# Altium PCB KB PoC.PcbDoc
Units mm, origin at the board's own origin, x right, y up, seen from the top; angles counter-clockwise.
Board outline 88.39 x 58.8 mm, 2 copper layers (Top Layer, Bottom Layer); 22 components, 19 nets, 144 pads, 12 vias.
Unrouted connection lines stored in the file: 2.
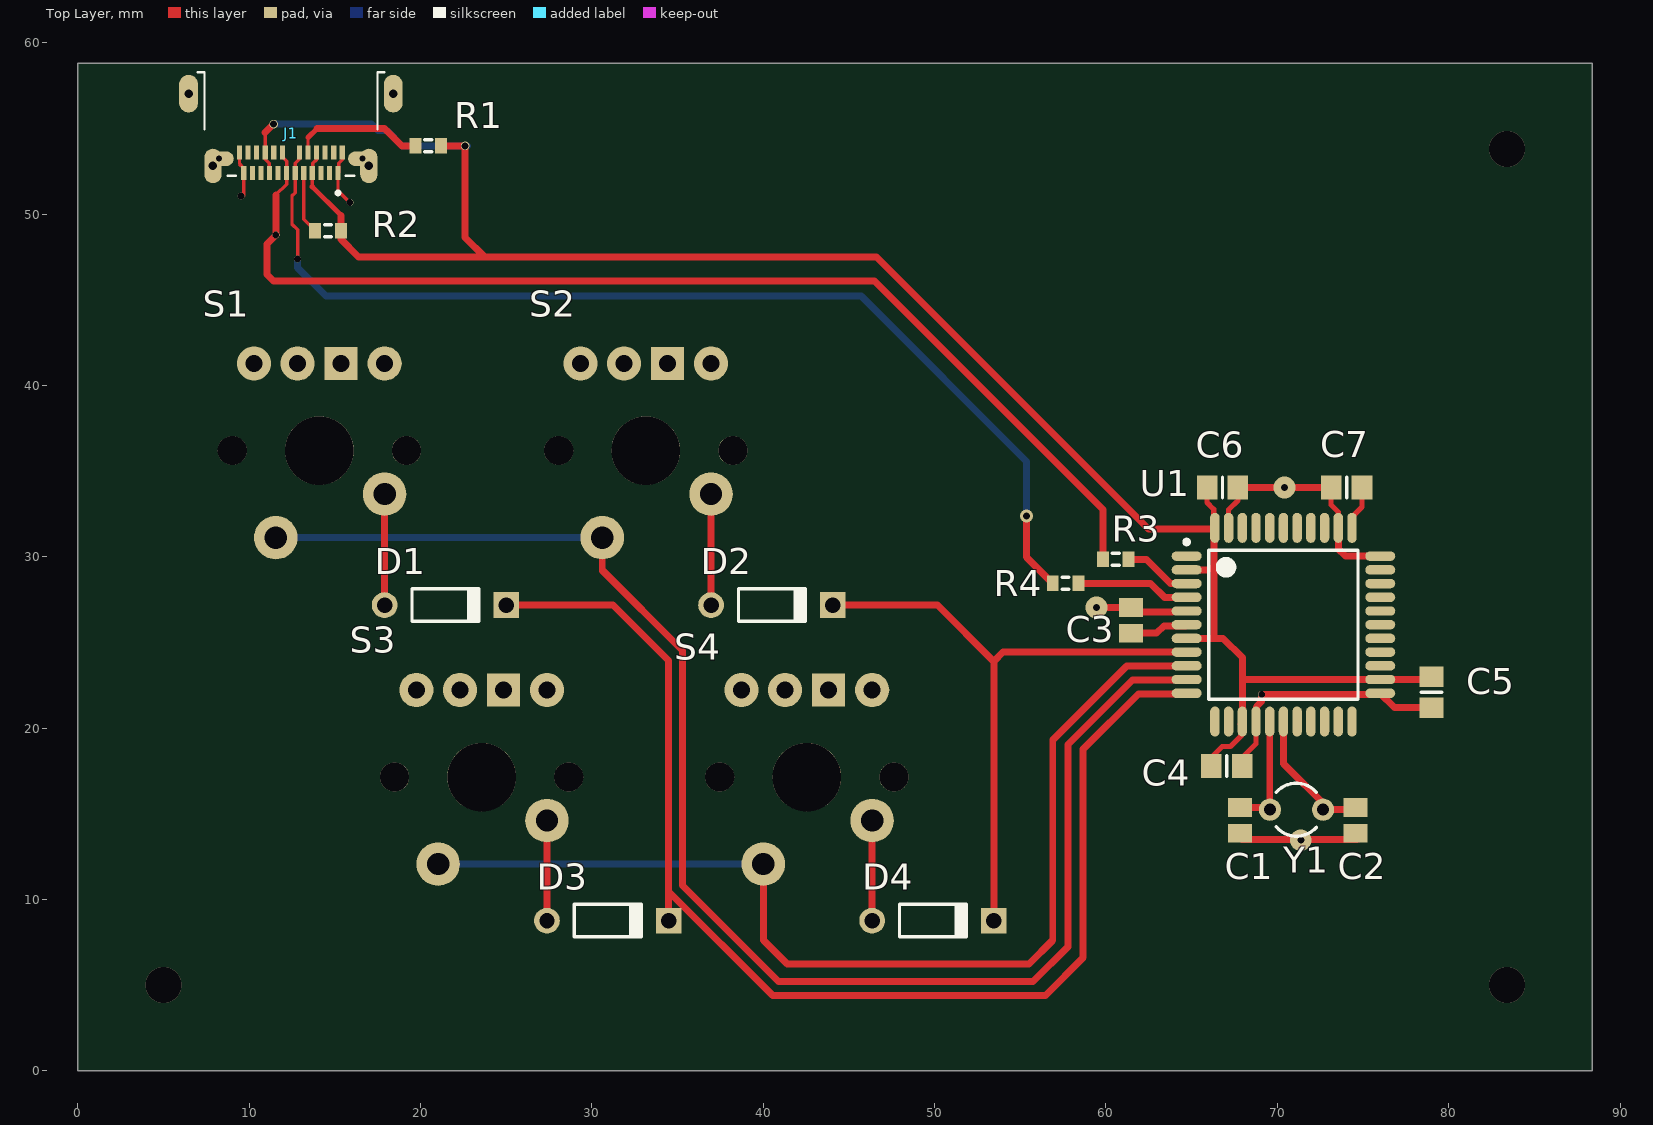
[diagram p0: Top Layer view]
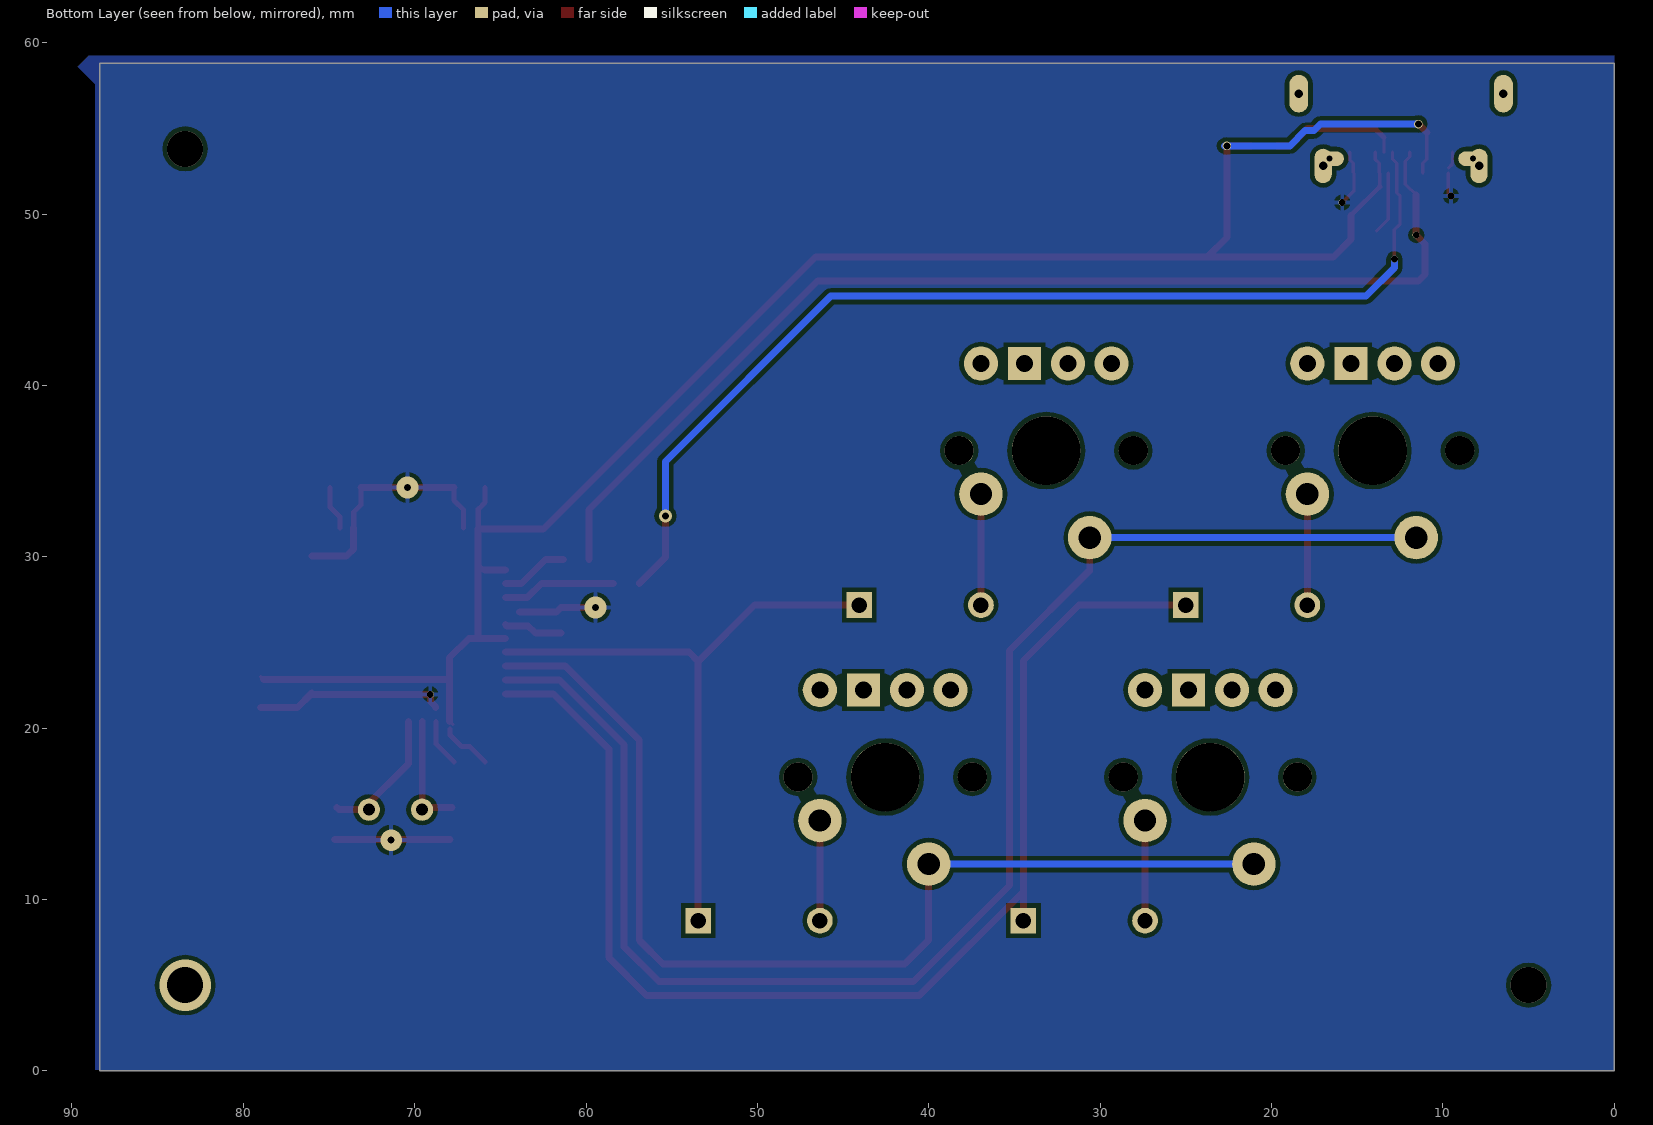
[diagram p1: Bottom Layer view, seen from below]

## Layer stack, top to bottom
Top Solder: solder mask 0.0102, Solder Resist, Dk 3.5
Top Layer: signal copper 0.0356
Dielectric 1: dielectric 0.32, FR-4, Dk 4.8
Bottom Layer: signal copper 0.0356
Bottom Solder: solder mask 0.0102, Solder Resist, Dk 3.5

## Board outline
0,0 88.392,0 88.392,58.801 0,58.801

## Design rules (kind name [scope] priority, off if disabled: settings)
Clearance [All] p1: gap=0.254 ignorepadtopadclearanceinfootprint=TRUE except(0: Arc-Hole Track-Hole SMDPad-Hole THPad-Hole Via-Hole Fill-Hole Poly-Hole Region-Hole Text-Hole; 0.406: Arc-Arc Arc-Track Track-Track)
PolygonConnect [All] p1: connectstyle=Relief reliefconductorwidth=0.254 reliefentries=4 polygonreliefangle="90 Angle" airgapwidth=0.254
RoutingVias [All] p1: holewidth=0.711 width=1.27 viastyle="Through Hole" minholewidth=0.711 minwidth=1.27 maxholewidth=0.711 maxwidth=1.27
SolderMaskExpansion [All] p1: expansion=0.102
Width [All] p1: maxlimit=0.406 minlimit=0.102 preferedwidth=0.406 minimp=50.000000 maximp=50.000000 favimp=50.000000
30 further rules are at their usual default settings.

## Components (designator, comment, footprint, x,y, rotation, side; value= is the part's Value field where it differs from the comment)
C1 "Cap Pol3" C0805 67.818,14.617 r270 top value=22pF
C2 "Cap Pol3" C0805 74.549,14.617 r270 top value=22pF
C3 "Cap Pol3" C0805 61.468,26.289 r90 top value=1uF
C4 "Cap" 6-0805_N 67.056,17.78 r180 top value=100nF
C5 "Cap" 6-0805_N 78.994,22.098 r90 top value=100nF
C6 "Cap" 6-0805_N 66.802,34.036 r180 top value=100nF
C7 "Cap" 6-0805_N 74.041,34.036 r0 top value=100nF
D1 "Diode 1N4148" DO-35 21.457,27.178 r0 top
D2 "Diode 1N4148" DO-35 40.507,27.178 r0 top
D3 "Diode 1N4148" DO-35 30.931,8.763 r0 top
D4 "Diode 1N4148" DO-35 49.905,8.763 r0 top
J1 "1-2295018-2" TE_1-2295018-2_1-2295018-2(Primary) 12.438,57.024 r180 top
R1 "Res3" J1-0603 20.447,53.975 r0 top value=5K1
R2 "Res3" J1-0603 14.605,49.022 r180 top value=5K1
R3 "Res3" J1-0603 60.579,29.845 r0 top value=22
R4 "Res3" J1-0603 57.646,28.448 r0 top value=22
S1 "KEYSWITCH-PLAIN-MX-1U" MX-1U-RGB 14.097,36.195 r180 top
S2 "KEYSWITCH-PLAIN-MX-1U" MX-1U-RGB 33.147,36.195 r180 top
S3 "KEYSWITCH-PLAIN-MX-1U" MX-1U-RGB 23.571,17.145 r180 top
S4 "KEYSWITCH-PLAIN-MX-1U" MX-1U-RGB 42.545,17.145 r180 top
U1 "ATmega32U4-AU" 44ML_N 70.358,26.035 r0 top
Y1 "XTAL" R38 71.12,15.24 r270 top

## Footprints (in the part's own frame and the unit in brackets; to place one, negate y for a bottom-side part, rotate by r counter-clockwise, add the part's x,y. Pads: shape width x height; smd on the part's side, far side on the other; paste and mask are expansions set on the pad)
6-0805_N [mm] "Chip Resistor, Body 2.0x1.2mm, IPC Medium Density"
  rect 1.2x1.4 smd: 1(-0.9,0) 2(0.9,0)
  silkscreen extent 0,-0.6 0,0.6, body extent -1.07,-0.7 1.07,0.7, height 0.7
44ML_N [mm] "Thin QFP, 44-Leads, Body 10x10mm, Pitch 0.8mm, IPC Medium Density"
  oval 1.75x0.55 smd: 1(-5.65,4) 2(-5.65,3.2) 3(-5.65,2.4) 4(-5.65,1.6) 5(-5.65,0.8) 6(-5.65,0) 7(-5.65,-0.8) 8(-5.65,-1.6) 9(-5.65,-2.4) 10(-5.65,-3.2) 11(-5.65,-4) 23(5.65,-4) 24(5.65,-3.2) 25(5.65,-2.4) 26(5.65,-1.6) 27(5.65,-0.8) 28(5.65,0) 29(5.65,0.8) 30(5.65,1.6) 31(5.65,2.4) 32(5.65,3.2) 33(5.65,4)
  oval 0.55x1.75 smd: 12(-4,-5.65) 13(-3.2,-5.65) 14(-2.4,-5.65) 15(-1.6,-5.65) 16(-0.8,-5.65) 17(0,-5.65) 18(0.8,-5.65) 19(1.6,-5.65) 20(2.4,-5.65) 21(3.2,-5.65) 22(4,-5.65) 34(4,5.65) 35(3.2,5.65) 36(2.4,5.65) 37(1.6,5.65) 38(0.8,5.65) 39(0,5.65) 40(-0.8,5.65) 41(-1.6,5.65) 42(-2.4,5.65) 43(-3.2,5.65) 44(-4,5.65)
  silkscreen extent -5.77,-4.35 4.35,4.95, body extent -5,-5 5,5, height 1.2
C0805 [mm] "Chip Capacitor, Body 2.0x1.3mm, IPC High Density"
  rect 1.1x1.4 smd: 1(-0.75,0) 2(0.75,0)
  body extent -1.1,-0.72 1.1,0.72, height 1.4
DO-35 [mm] "Diode, Axial; Body 3.8 x 1.9 mm (LxDia. max), Lead Dia. 0.53 mm (max)"
  round 1.5 hole 0.9: 1(-3.55,0)
  rect 1.5x1.5 hole 0.9: 2(3.55,0)
  silkscreen extent -1.95,-0.95 2.05,0.95
J1-0603 [mm] "Chip Resistor, Body 1.6x0.8mm, IPC High Density"
  rect 0.7x0.9 smd: 1(-0.75,0) 2(0.75,0)
  silkscreen extent -0.2,-0.35 0.2,0.35, body extent -0.85,-0.48 0.85,0.48, height 0.9
MX-1U-RGB [mm]
  round 1.7 hole 1.7 unplated: 1(-5.08,0) 1(5.08,0)
  round 4 hole 4 unplated: 1(0,0)
  round 2 / inner round 1.524 / far side round 2 hole 1: B-(3.81,-5.08) G-(1.27,-5.08) R-(-3.81,-5.08)
  rect 1.936x1.936 / inner rect 1.524x1.524 / far side rect 1.936x1.936 hole 1: LED+(-1.27,-5.08)
  round 2.54 / inner round 1.524 / far side round 2.54 hole 1.3: MX1(-3.81,2.54) MX2(2.54,5.08)
R38 [mm] "Crystal, Thru-Hole; 2 Leads; Body 3.1 x 8.2 mm (Dia.xH)"
  round 1.3 hole 0.7: 1(0,1.55) 2(0,-1.55)
  silkscreen extent -1.55,-1.19 1.55,1.17
TE_1-2295018-2_1-2295018-2(Primary) [mm]
  rect 0.3x0.8 smd: A1(-2.75,4.63) A2(-2.25,4.63) A3(-1.75,4.63) A4(-1.25,4.63) A5(-0.75,4.63) A6(-0.25,4.63) A7(0.25,4.63) A8(0.75,4.63) A9(1.25,4.63) A10(1.75,4.63) A11(2.25,4.63) A12(2.75,4.63) B1(3,3.43) B2(2.5,3.43) B3(2,3.43) B4(1.5,3.43) B5(1,3.43) B6(0.5,3.43) B7(-0.5,3.43) B8(-1,3.43) B9(-1.5,3.43) B10(-2,3.43) B11(-2.5,3.43) B12(-3,3.43)
  oval 1.008x2.016 hole 0.5: P1_1(-4.55,4.22) P2_1(4.55,4.22)
  oval 1.716x0.858 hole 0.35: P1_2(-4.191,3.795) P2_2(4.191,3.795)
  oval 1.1x2.2 hole 0.5: P4(-5.97,0) P5(5.97,0)
  silkscreen extent -5.45,-1.25 5.45,5.89

## Part data
C1 C2 C3: "Polarized Capacitor (Surface Mount)", LatestRevisionDate=29-May-2009, LatestRevisionNote="IPC-7351 Footprint Added.", PackageDescription="Chip Capacitor", PackageReference=C0805, Published=8-Jun-2000, Publisher="Altium Limited"
C4 C5 C6 C7: "Capacitor", LatestRevisionDate=17-Jul-2002, LatestRevisionNote="Re-released for DXP Platform.", PackageDescription="Radial Cap, Thru-Hole; 2 Leads; 0.3 in Pin Spacing", PackageReference=RAD-0.3, Published=8-Jun-2000, Publisher="Altium Limited"
D1 D2 D3 D4: "High Conductance Fast Diode", Code_JEDEC=DO-204-AH, ComponentLink1Description="Manufacturer Link", ComponentLink1URL=http://www.fairchildsemi.com/, ComponentLink2Description=Datasheet, ComponentLink2URL=http://www.fairchildsemi.com/ds/1N%2F1N4148.pdf, DatasheetVersion=1997, LatestRevisionDate=17-Jul-2002, LatestRevisionNote="Re-released for DXP Platform.", PackageDescription="Diode, Axial; Body 3.8 x 1.9 mm (LxDia. max), Lead Dia. 0.53 mm (max)", PackageReference=DO-35, Published=8-Jun-2000, Publisher="Altium Limited"
J1: "USB TYPE C, REC OFFSET 0.65MM DUAL SMT", Package=None, Availability=Good, Centerline_Pitch=".5 mm[.019 in]", MF="TE Connectivity", MP=1-2295018-2, Number_of_Positions=24, Price="1.78 USD", Product_Type=Connector, SnapEDA_Link=https://www.snapeda.com/parts/1-2295018-2/TE%20Connectivity%20AMP%20Connectors/view-part/?ref=snap
R1 R2 R3 R4: "Resistor", LatestRevisionDate=29-May-2009, LatestRevisionNote="IPC-7351 Footprint Added.", PackageDescription="Chip Resistor", PackageReference=J1-0603, Published=8-Jun-2000, Publisher="Altium Limited"
S1 S2 S3 S4: Package=MX-1U, DeviceName=-MX-1U, DeviceSetName=KEYSWITCH-PLAIN, GateName_1=G$1, LibraryName=Keyboard, SymbolName_1=KEYSWITCH-PLAIN
U1: "8-bit AVR Microcontroller, 2.7-5.5V, 16MHz, 32KB Flash, 1KB EEPROM, 2.5KB SRAM, USB Controller, 44-pin TQFP, Industrial Grade (-40°C to 85°C), Ext Osc", ComponentLink1Description="Manufacturer URL", ComponentLink1URL=http://www.atmel.com/, ComponentLink2Description="ATmega16U4/32U4 Datasheet", ComponentLink2URL=http://www.atmel.com/dyn/resources/prod_documents/doc7766.pdf, ComponentLink3Description="ATmega16U4 ATmega32U4 Summary", ComponentLink3URL=http://www.atmel.com/dyn/resources/prod_documents/7766S.pdf, DatasheetVersion="revF, Nov-2010", PackageDescription="44-Pin Plastic Thin Quad Flat Pack, 10 x 10 x 1.0 mm Body, 0.8 mm Pitch (TQFP)", PackageReference=44ML, PackageVersion="rev.G, Jul-2007"
Y1: "Crystal Oscillator", LatestRevisionDate=17-Jul-2002, LatestRevisionNote="Re-released for DXP Platform.", PackageDescription="Crystal, Thru-Hole; 2 Leads; Body 3.1 x 8.2 mm (Dia.xH)", PackageReference=R38, Published=8-Jun-2000, Publisher="Altium Limited"

## Free pads (board coordinates)
  round 0.5 hole 0.4: 3(11.43,55.245) 4(22.606,53.975)

## Via types
v1: diameter 0.406, hole 0.4, Top Layer to Bottom Layer, 5 vias
v2: diameter 1.27, hole 0.4, Top Layer to Bottom Layer, 3 vias
v3: diameter 2.1, hole 2.1, Top Layer to Bottom Layer, 2 vias
v4: diameter 2.1/3 (per signal layer), hole 2.1, Top Layer to Bottom Layer, 1 vias
v5: diameter 0.762, hole 0.4, Top Layer to Bottom Layer, 1 vias

## Nets (pads, with @x,y where several pads share a name; then routed paths per layer and width w, separated by ;. In a path a pad name is that pad's centre, name@x,y a point inside that pad or via, vN(x,y) a via of type N, cw(c..) or ccw(c..) an arc to the next point about the centre after c; other vN are vias at no path point)
+5: C4.2 C5.2 C6.2 C7.2 J1.A4 J1.A9 J1.B4 J1.B9 pad.3 pad.4 R1.2 R2.1 U1.2 U1.7 U1.13 U1.14 U1.24 U1.34 U1.44 | length 122.3
  Top Layer w0.2: 10.938,54.753 J1.B4 10.938,53.197 11.176,52.959 11.176,52.406 J1.A9 ; 13.688,51.59 J1.A4 13.716,52.422 13.716,52.959 13.938,53.181 J1.B9
  Top Layer w0.203: C4.2@65.902,18.034 C4.2@65.902,18.037 ; 65.938,29.235 66.294,29.591 ; U1.14@67.789,20.216 U1.14 ; 67.958,22.86 67.983,22.835 ; C5.2@78.831,22.835 C5.2
  Top Layer w0.3: 13.688,51.59 15.355,49.923
  Top Layer w0.305: C4.2@65.902,18.037 66.788,18.923 67.27,18.923 67.945,19.598 U1.14@67.945,19.939 ; C6.2 65.902,33.158 66.294,32.766 U1.44@66.294,31.621 ; U1.34 74.358,32.321 74.941,32.904 C7.2
  Top Layer w0.4: R2.1 15.355,49.923
  Top Layer w0.406: 10.938,54.753 pad.3 ; R2.1 15.355,48.526 16.383,47.498 23.749,47.498 ; R1.2 pad.4 22.606,48.641 23.749,47.498 ; U1.7 66.294,25.235 ; U1.2 65.938,29.235 ; U1.14 67.958,22.86 67.958,24.117 66.84,25.235 66.294,25.235 ; 67.983,22.835 U1.24 C5.2@78.831,22.835 ; 23.749,47.498 46.609,47.498 62.486,31.621 66.294,31.621 66.294,29.591 66.294,25.235
  Bottom Layer w0.406: pad.3 17.145,55.245 17.526,54.864 18.034,54.864 18.923,53.975 pad.4 pad.4@22.733,53.975
GND: C1.2 C2.2 C3.2 C4.1 C5.1 C6.1 C7.1 J1.A1 J1.A12 J1.B1 J1.B12 U1.5 U1.15 U1.23 U1.33 U1.35 U1.43 | length 45.3
  Top Layer w0.2: J1.B1 9.438,52.919 J1.A12@9.652,52.705 ; v1@9.688,51.054 J1.A12 ; J1.B12 15.438,53.157 15.24,52.959 15.24,52.446 J1.A1 15.188,51.36 v1(15.875,50.673)
  Top Layer w0.203: U1.23@75.944,21.971 U1.23
  Top Layer w0.305: U1.43 67.158,32.741 67.702,33.285 C6.1 ; C4.1@67.702,18.034 68.758,19.09 U1.15 ; C7.1 73.141,33.031 73.558,32.614 U1.35
  Top Layer w0.406: v2(59.448,27.039) C3.2 61.727,26.78 U1.5@63.881,26.78 ; C6.1 v2(70.421,34.036) C7.1 ; C1.2@67.945,13.486 C2.2@74.676,13.486 ; U1.15@68.771,21.209 68.826,21.264 68.826,21.288 69.088,21.55 v1(69.088,21.971) U1.23@75.944,21.971 ; U1.35 73.558,30.455 73.978,30.035 U1.33 ; U1.23 76.845,21.198 C5.1
  other v1: 9.525,51.054
  other v2: 71.374,13.462
NetC1_1: C1.1 U1.16 Y1.2 | length 7
  Top Layer w0.406: C1.1 69.697,15.367 69.558,15.506 U1.16
NetC2_1: C2.1 U1.17 Y1.1 | length 7.9
  Top Layer w0.406: U1.17@70.371,20.385 70.371,17.92 Y1.1@72.86,15.43 ; Y1.1 74.422,15.24 C2.1
NetC3_1: C3.1 U1.6 | length 3.4
  Top Layer w0.406: C3.1 62.948,25.539 63.377,25.967 64.64,25.967 U1.6
NetD1_1: D1.1 S1.MX1 | length 6.5
  Top Layer w0.406: D1.1 S1.MX1
NetD1_2: D1.2 D3.2 U1.11 | length 73.2
  Top Layer w0.406: D1.2 31.242,27.178 34.481,23.939 34.481,10.47 ; D3.2 34.481,10.47 ; U1.11@64.708,21.997 61.888,21.997 58.674,18.783 58.674,6.604 56.464,4.394 40.557,4.394 34.481,10.47
NetD2_1: D2.1 S2.MX1 | length 6.5
  Top Layer w0.406: D2.1 S2.MX1
NetD2_2: D2.2 D4.2 U1.8 | length 37.4
  Top Layer w0.406: D2.2 50.165,27.178 53.455,23.888 ; D4.2 53.455,23.888 ; U1.8 54.002,24.435 53.455,23.888
NetD3_1: D3.1 S3.MX1 | length 5.8
  Top Layer w0.406: D3.1 S3.MX1
NetD4_1: D4.1 S4.MX1 | length 5.8
  Top Layer w0.406: D4.1 S4.MX1
NetJ1_A5: J1.A5 R2.2 | length 3.6
  Top Layer w0.2: J1.A5 13.188,49.689 R2.2
NetJ1_A6: J1.A6 J1.B7 R4.1 | length 62
  Top Layer w0.2: v1(12.827,47.371) 12.827,49.08 12.502,49.405 12.502,51.054 12.688,51.24 J1.A6 12.7,52.406 12.7,52.959 12.938,53.197 J1.B7
  Top Layer w0.406: v5(55.372,32.385) 55.372,29.972 R4.1
  Bottom Layer w0.406: v1(12.827,47.371) 12.827,46.863 14.478,45.212 45.72,45.212 55.372,35.56 v5(55.372,32.385)
NetJ1_A7: J1.A7 J1.B6 R3.1 | length 65.1
  Top Layer w0.2: 11.557,51.112 12.188,51.743 J1.A7 12.192,52.398 12.192,53.086 11.938,53.34 J1.B6
  Top Layer w0.406: 11.557,51.112 v1(11.557,48.768) 11.049,48.26 11.049,46.482 11.43,46.101 46.482,46.101 59.829,32.754 R3.1
NetJ1_B8: J1.B8 R1.1 | length 7.8
  Top Layer w0.2: J1.B8 13.438,54.459
  Top Layer w0.3: 13.438,54.459 13.97,54.991
  Top Layer w0.406: 13.97,54.991 17.907,54.991 18.923,53.975 R1.1
NetR3_2: R3.2 U1.3 | length 4
  Top Layer w0.406: R3.2 62.357,29.845 63.767,28.435 U1.3
NetR4_2: R4.2 U1.4 | length 6.7
  Top Layer w0.406: R4.2 62.605,28.448 63.43,27.622 U1.4@64.708,27.622
NetS1_MX2: S1.MX2 S2.MX2 U1.10 | length 87.2
  Top Layer w0.406: S2.MX2 30.607,29.21 35.294,24.523 35.294,10.807 40.894,5.207 55.753,5.207 57.785,7.239 57.785,19.044 61.551,22.809 U1.10@64.708,22.809
  Bottom Layer w0.406: S1.MX2 S2.MX2
NetS3_MX2: S3.MX2 S4.MX2 U1.9 | length 62.8
  Top Layer w0.406: S4.MX2 40.005,7.62 41.402,6.223 55.499,6.223 56.896,7.62 56.896,19.304 61.214,23.622 U1.9@64.708,23.622
  Bottom Layer w0.406: S3.MX2 S4.MX2
pads on no net: J1.A2 J1.A3 J1.A8 J1.A10 J1.A11 J1.B2 J1.B3 J1.B5 J1.B10 J1.B11 J1.P1_1 J1.P1_2 J1.P2_1 J1.P2_2 J1.P4 J1.P5 S1.1 S1.B- S1.G- S1.LED+ S1.R- S2.1 S2.B- S2.G- S2.LED+ S2.R- S3.1 S3.B- S3.G- S3.LED+ S3.R- S4.1 S4.B- S4.G- S4.LED+ S4.R- U1.1 U1.12 U1.18 U1.19 U1.20 U1.21 U1.22 U1.25 U1.26 U1.27 U1.28 U1.29 U1.30 U1.31 U1.32 U1.36 U1.37 U1.38 U1.39 U1.40 U1.41 U1.42
copper on no net:
  other v3: 5,5 83.392,53.801
  other v4: 83.392,5

## Polygon pours and split planes (outlines as drawn)
no net on Top Layer "GND" (solid, pour order 2): 78.359,40.767
GND on Bottom Layer "GND" (solid, pour order 0): 0,0.053 0,59.235 89.027,59.235 89.662,58.6 88.646,57.584 88.646,0.053

## Silkscreen, mask and mechanical layers (free items; w line width, h text height)
Mechanical 2:
  drawing of 288 lines, arcs and shapes, not listed